# Altium PCB Active_LPF_PCB.PcbDoc
Units mm, origin at the board's own origin, x right, y up, seen from the top; angles counter-clockwise.
Board outline 46 x 38 mm, 2 copper layers (Top Layer, Bottom Layer); 12 components, 12 nets, 40 pads, 0 vias.
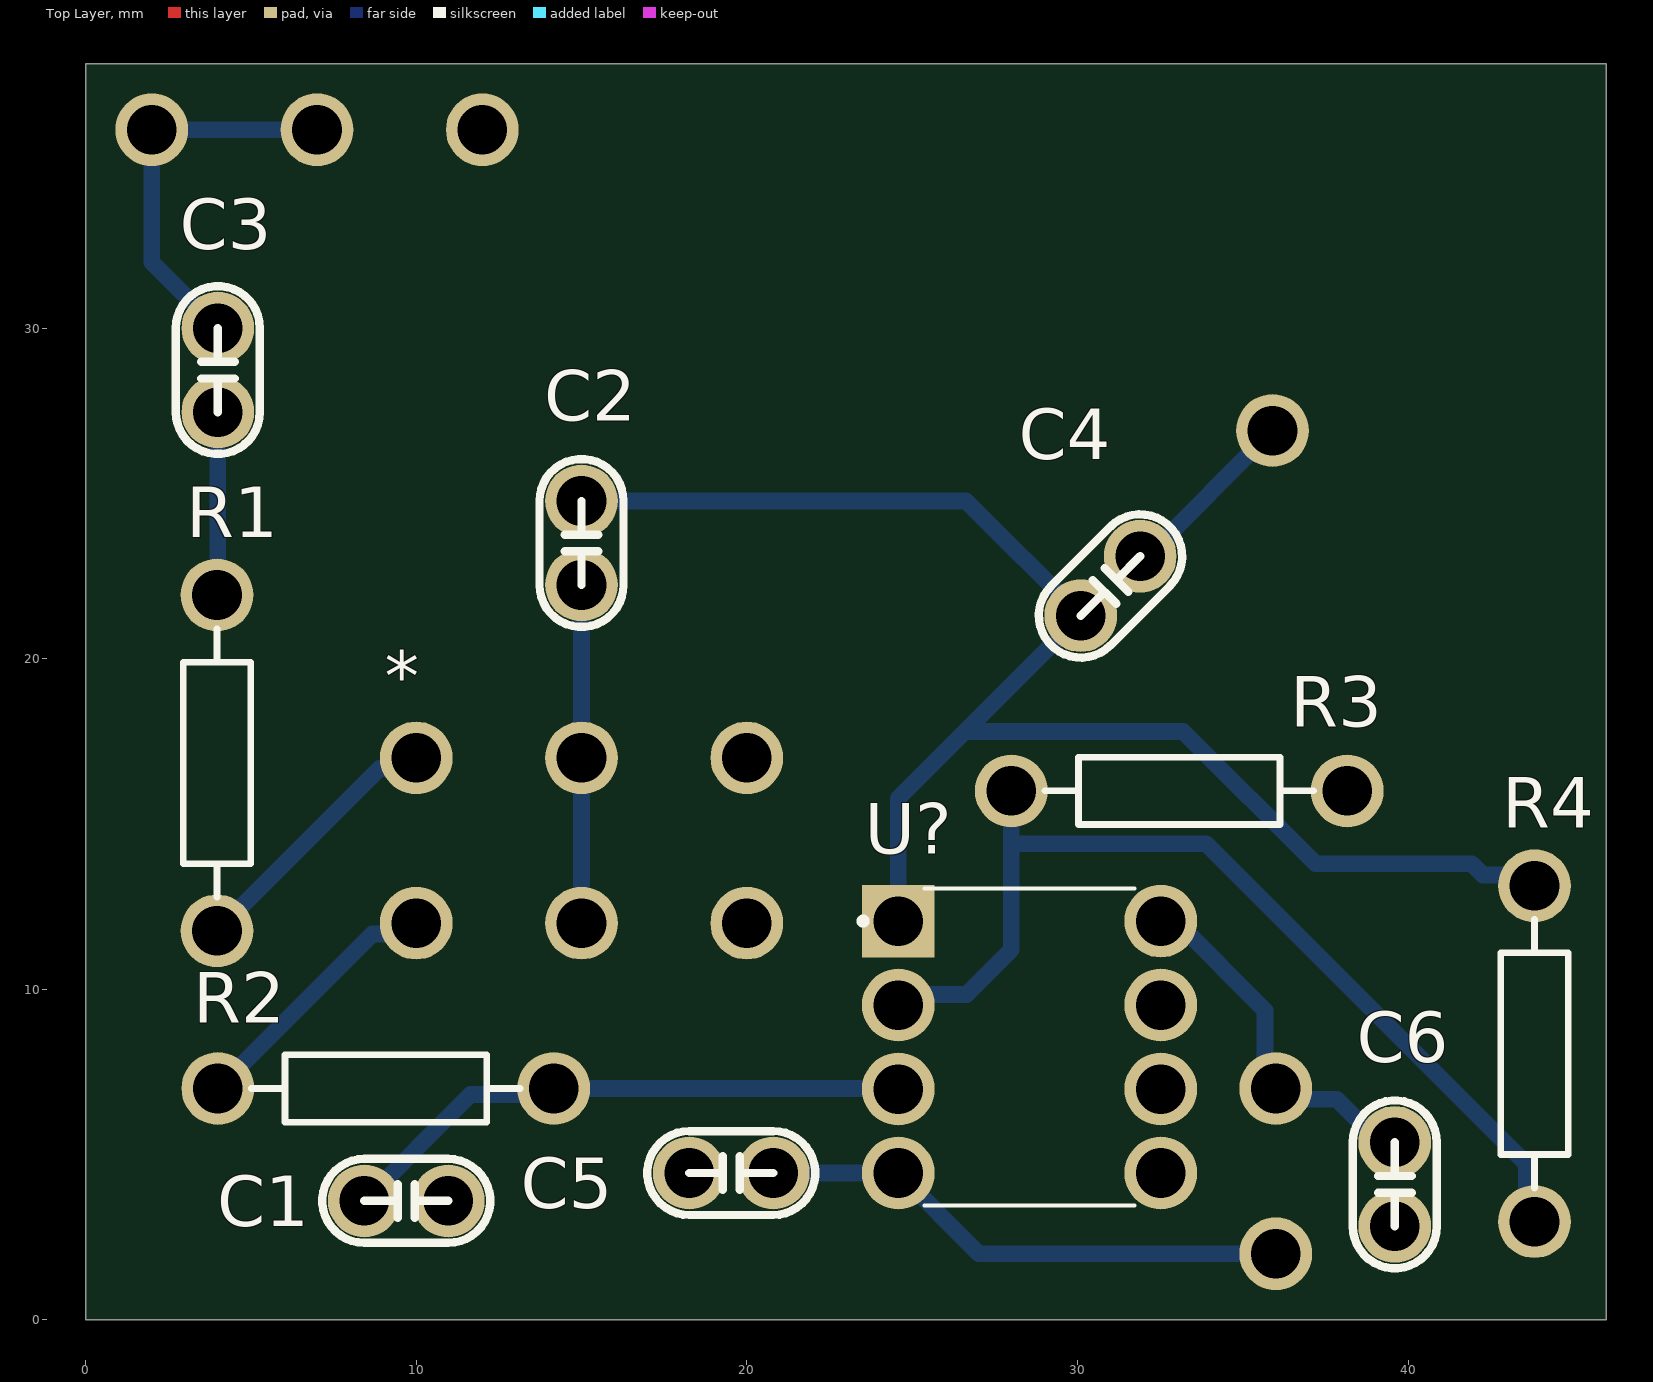
[diagram p0: Top Layer view]
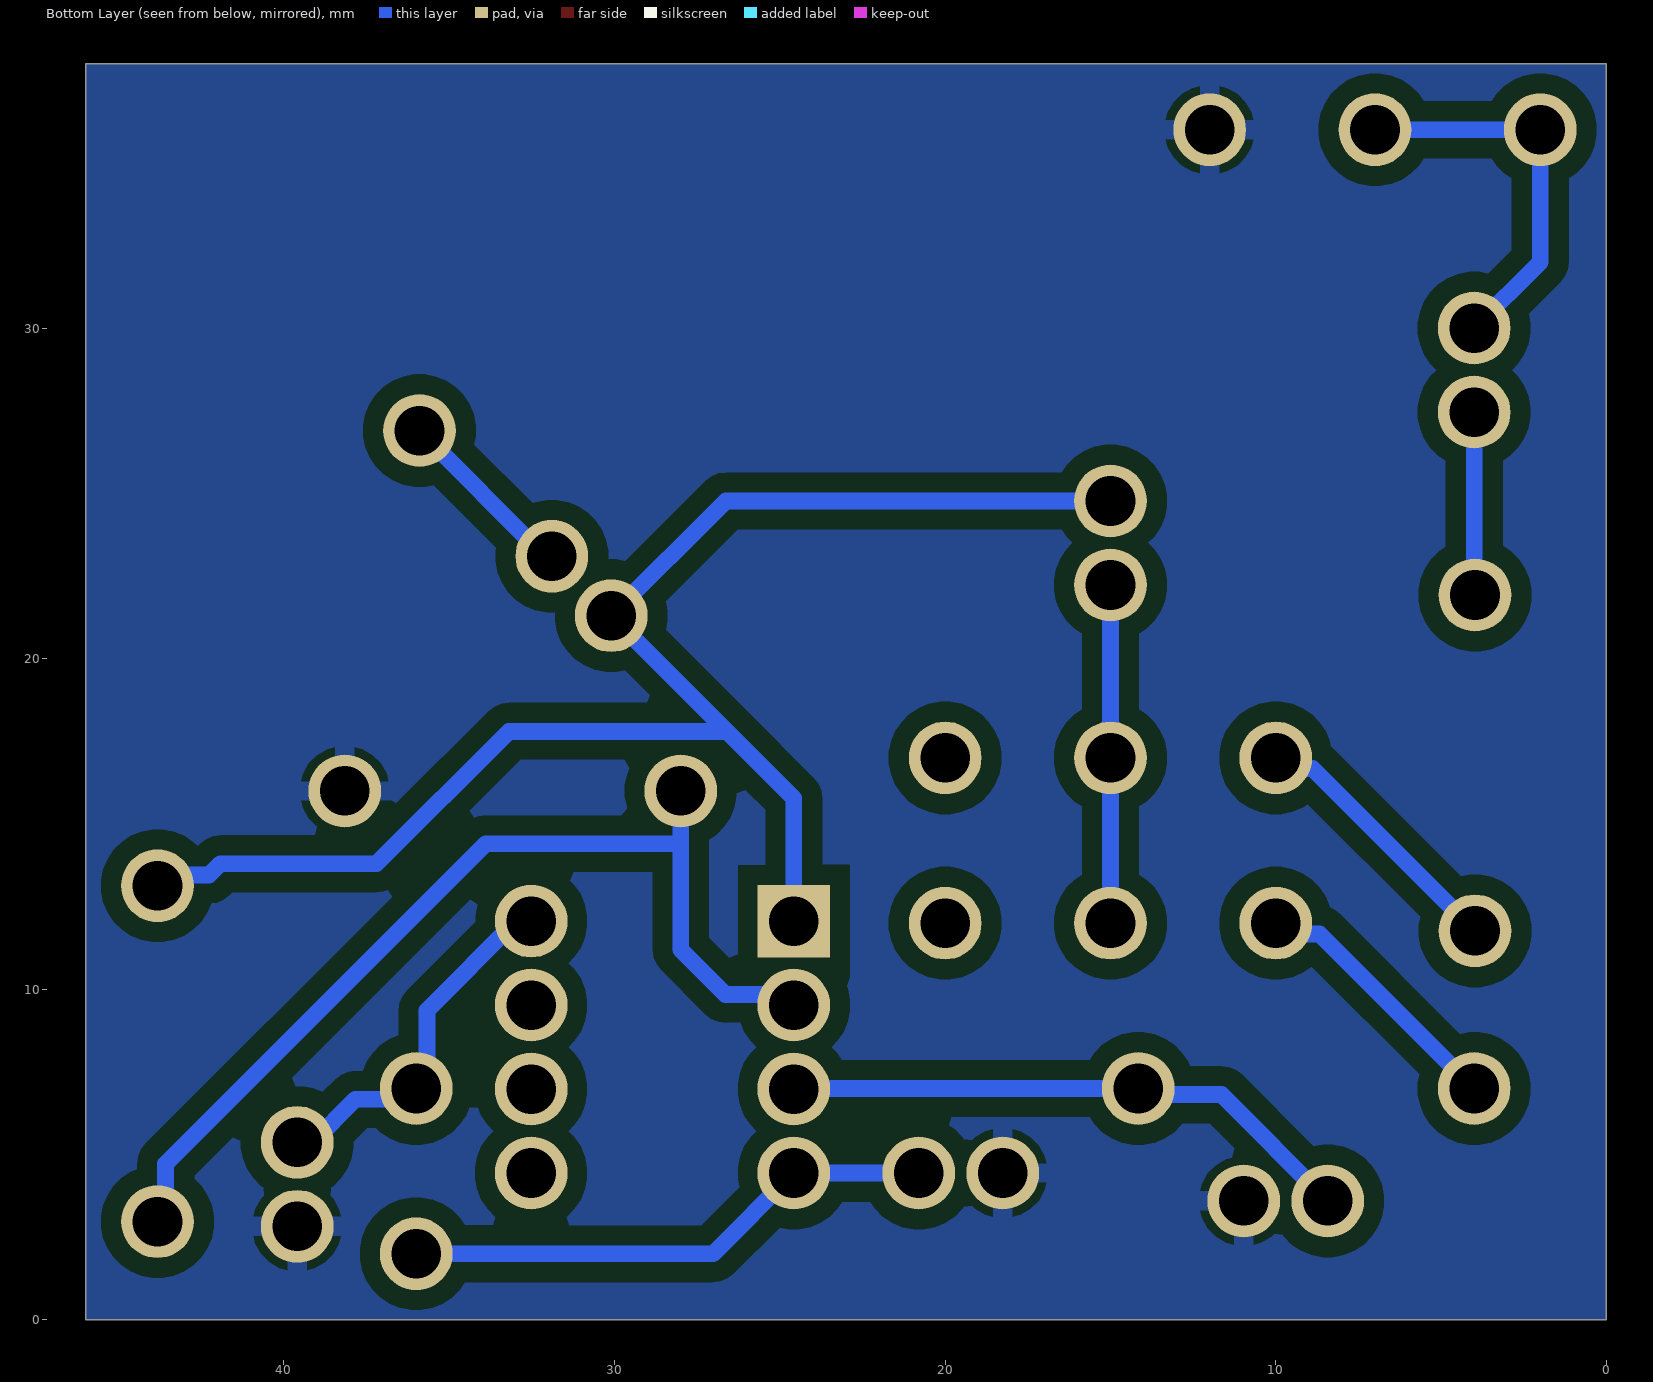
[diagram p1: Bottom Layer view, seen from below]
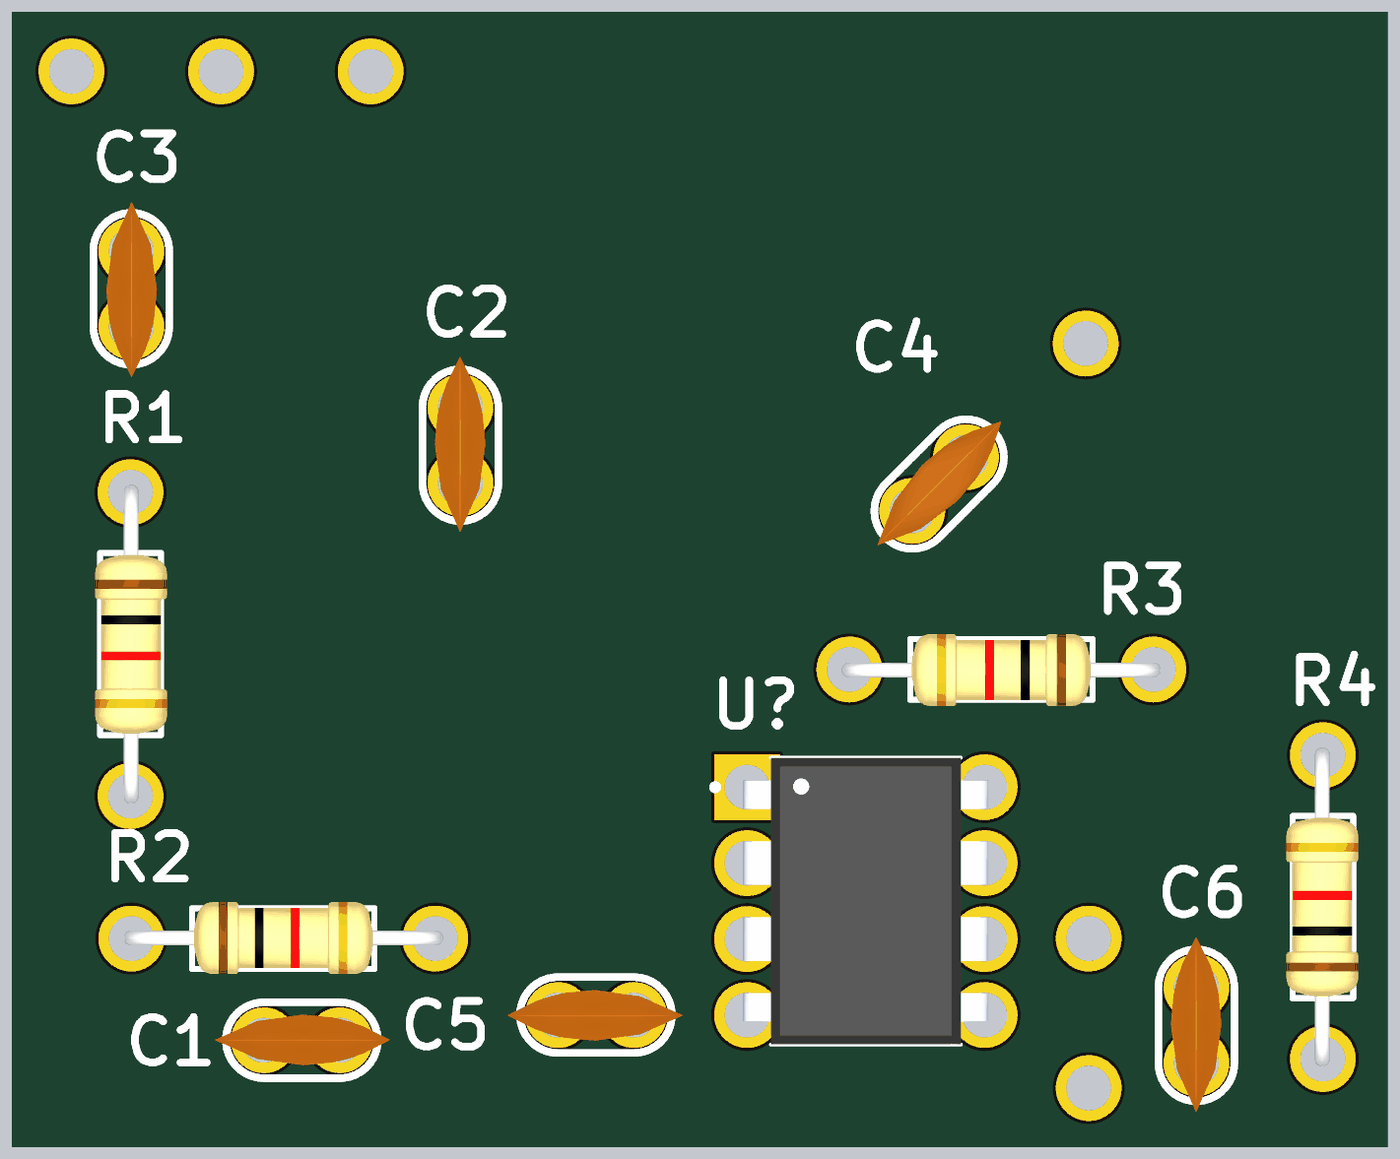
[diagram p2: 3D render of the assembled board from above, using the file's embedded part models]

## Layer stack, top to bottom
Top Solder: solder mask 0.0102, Solder Resist, Dk 3.5
Top Layer: signal copper 0.0356
Dielectric 1: dielectric 0.32, FR-4, Dk 4.8
Bottom Layer: signal copper 0.0356
Bottom Solder: solder mask 0.0102, Solder Resist, Dk 3.5

## Board outline
0,0 46,0 46,38 0,38

## Design rules (kind name [scope] priority, off if disabled: settings)
Clearance [All] p1: gap=0.254 ignorepadtopadclearanceinfootprint=FALSE except(0.6: Arc-Poly Track-Poly SMDPad-Poly THPad-Poly Via-Poly Fill-Poly Poly-Poly Poly-Region Poly-Text Poly-Hole)
PolygonConnect [All] p1: connectstyle=Relief reliefconductorwidth=0.6 reliefentries=4 polygonreliefangle="90 Angle" airgapwidth=0.254
RoutingVias [All] p1: holewidth=0.711 width=1.27 viastyle="Through Hole" minholewidth=0.711 minwidth=1.27 maxholewidth=0.711 maxwidth=1.27
SolderMaskExpansion [All] p1: expansion=0.102 istentingtop=FALSE
SupplyNets "Schematic Supply Nets_4" [InNet('GND')] p1: voltage=0.000
SupplyNets "Schematic Supply Nets_3" [InNet('-9V')] p2: voltage=0.000
SupplyNets "Schematic Supply Nets_2" [InNet('Signal Out')] p3: voltage=0.000
SupplyNets "Schematic Supply Nets_1" [InNet('VIN')] p4: voltage=0.000
SupplyNets "Schematic Supply Nets" [InNet('+9V')] p5: voltage=0.000
Width [All] p1: maxlimit=1 minlimit=0.254 preferedwidth=0.254 minimp=50.000000 maximp=50.000000 favimp=50.000000
30 further rules are at their usual default settings.

## Components (designator, comment, footprint, x,y, rotation, side; value= is the part's Value field where it differs from the comment)
* "DualPot" DualPot -455,-14 r0 top
C1 "100nF" Cap 9.7,3.6 r0 top
C2 "100nF" Cap 15,23.5 r90 top
C3 "1uF" Cap 4,28.73 r270 top
C4 "1uF" Cap 31,22.2 r45 top
C5 "100nF" Cap 19.53,4.442 r180 top
C6 "100nF" Cap 39.6,4.1 r90 top
R1 "1K" Res-(1/4) 4,17 r270 top
R2 "1K" Res-(1/4) 8.928,7.025 r0 top
R3 "10k" Res-(1/4) 33.232,15.975 r180 top
R4 "5.6k" Res-(1/4) 43.8,7.9 r90 top
U? "LM358PE3" DIP794W45P254L959H508Q8 28.552,8.252 r0 top

## Footprints (in the part's own frame and the unit in brackets; to place one, negate y for a bottom-side part, rotate by r counter-clockwise, add the part's x,y. Pads: shape width x height; smd on the part's side, far side on the other; paste and mask are expansions set on the pad)
Cap [mm]
  round 2.2 hole 1.5: 1(-1.27,0) 2(1.27,0)
  silkscreen extent -2.54,-1.27 2.54,1.27, body extent -2.9,-0.84 2.94,0.86, height 6.42
DIP794W45P254L959H508Q8 [mm]
  rect 2.2x2.2 / inner round 2.2 / far side rect 2.2x2.2 hole 1.5 mask+0.102: 1(-3.97,3.81)
  round 2.2 hole 1.5 mask+0.102: 2(-3.97,1.27) 3(-3.97,-1.27) 4(-3.97,-3.81) 5(3.97,-3.81) 6(3.97,-1.27) 7(3.97,1.27) 8(3.97,3.81)
  silkscreen extent -5.13,-4.79 3.17,4.79, body extent -4.1,-4.79 4.1,4.79, height 5.08
DualPot [mm]
  round 2.2 hole 1.5: 0(465,26) 1(470,26) 2(475,26) 3(475,31) 4(470,31) 5(465,31)
Res-(1/4) [mm]
  round 2.2 hole 1.5: 1(-4.928,-0.025) 2(5.232,-0.025)
  silkscreen extent -3.91,-1.04 4.22,0.99, body extent -5.17,-1.21 5.49,1.19, height 2.39

## Part data
C1 C2 C3 C4 C5 C6: library part Cap_Multi_THT, "Multi layer capacitor", Package=Package?, Rating=Rating?, Type=Type?, Validation=Valid, Inflow=inflow?
R1 R2 R3 R4: library part Res_THT, "Resistor", Package=Dip, Rating=0.25W, Type=10%, Validation=Valid, Inflow=inflow?
U?: "Dual, 30-V, 700-kHz operational amplifier", Package="PDIP-8 Texas", Check_prices=https://www.snapeda.com/parts/LM358PE3/Texas+Instruments/view-part/?ref=eda, MF="Texas Instruments", MP=LM358PE3, SnapEDA_Link=https://www.snapeda.com/parts/LM358PE3/Texas+Instruments/view-part/?ref=snap

## Free pads (board coordinates)
  round 2.2 hole 1.5: 8(2,36) 8(7,36) 8(12,36) 8(35.9,26.9) 8(36,2) 8(36,7)

## Nets (pads, with @x,y where several pads share a name; then routed paths per layer and width w, separated by ;. In a path a pad name is that pad's centre, name@x,y a point inside that pad or via, vN(x,y) a via of type N, cw(c..) or ccw(c..) an arc to the next point about the centre after c; other vN are vias at no path point)
+9V: C6.2 pad.8@36,7 U?.8 | length 11
  Bottom Layer w0.508: U?.8 32.979,12.062 35.676,9.366 35.676,7.324 36,7 36.324,6.676 37.836,6.676 39.142,5.37 C6.2
-9V: C5.1 pad.8@36,2 U?.4 | length 16.2
  Bottom Layer w0.508: C5.1 U?.4 27.024,2 pad.8@36,2
GND: C1.2 C5.2 C6.1 pad.8@12,36 R3.1
Net*_0: *.0 R2.1 | length 8.1
  Bottom Layer w0.508: R2.1 8.676,11.676 9.676,11.676 *.0
Net*_5: *.5 R1.2 | length 8.2
  Bottom Layer w0.508: R1.2 8.883,16.676 9.676,16.676 *.5
NetC1_1: C1.1 R2.2 U?.3 | length 18
  Bottom Layer w0.508: C1.1@8.13,3.5 C1.1@8.43,3.2 ; C1.1 11.645,6.815 13.975,6.815 R2.2 U?.3@24.564,7
NetC2_2: C2.2 C4.1 R4.2 U?.1 | length 47.6
  Bottom Layer w0.508: C2.2@15.421,24.77 C2.2 26.634,24.77 C4.1 ; U?.1 24.582,15.782 26.6,17.8 ; C4.1@30.102,21.204 30.004,21.204 26.6,17.8 ; R4.2 43.502,13.456 42.261,13.456 41.917,13.8 37.2,13.8 33.2,17.8 26.6,17.8
NetC3_2: C3.2 R1.1 | length 5.5
  Bottom Layer w0.508: R1.1 4,21.953 C3.2
NetR3_2: R3.2 R4.1 U?.2 | length 30.4
  Bottom Layer w0.508: U?.2 24.905,9.846 26.646,9.846 28,11.2 28,14.4 ; R3.2 28,14.4 ; R4.1 43.582,3.215 43.582,4.715 33.897,14.4 28,14.4
POTLEG: *.1 *.4 C2.1 | length 10.2
  Bottom Layer w0.508: *.1 *.4 C2.1
"Signal Out": C4.2 pad.8@35.9,26.9 | length 5.6
  Bottom Layer w0.508: C4.2 32.098,23.098 pad.8@35.9,26.9
VIN: C3.1 pad.8@2,36 pad.8@7,36 | length 11.8
  Bottom Layer w0.508: C3.1 2,32 2,36 pad.8@7,36
pads on no net: *.2 *.3 U?.5 U?.6 U?.7

## Polygon pours and split planes (outlines as drawn)
GND on Bottom Layer "NONET_L-01_P-001" (solid, pour order 0): 0,0 0,38 46,38 46,0